# Altium PCB driver_lift_pcb.PcbDoc (part 2 of 2)
Units mm, origin at the board's own origin, x right, y up, seen from the top; angles counter-clockwise.
Board outline 100.2 x 76.58 mm, 2 copper layers (Top Layer, Bottom Layer); 113 components, 100 nets, 427 pads, 166 vias.
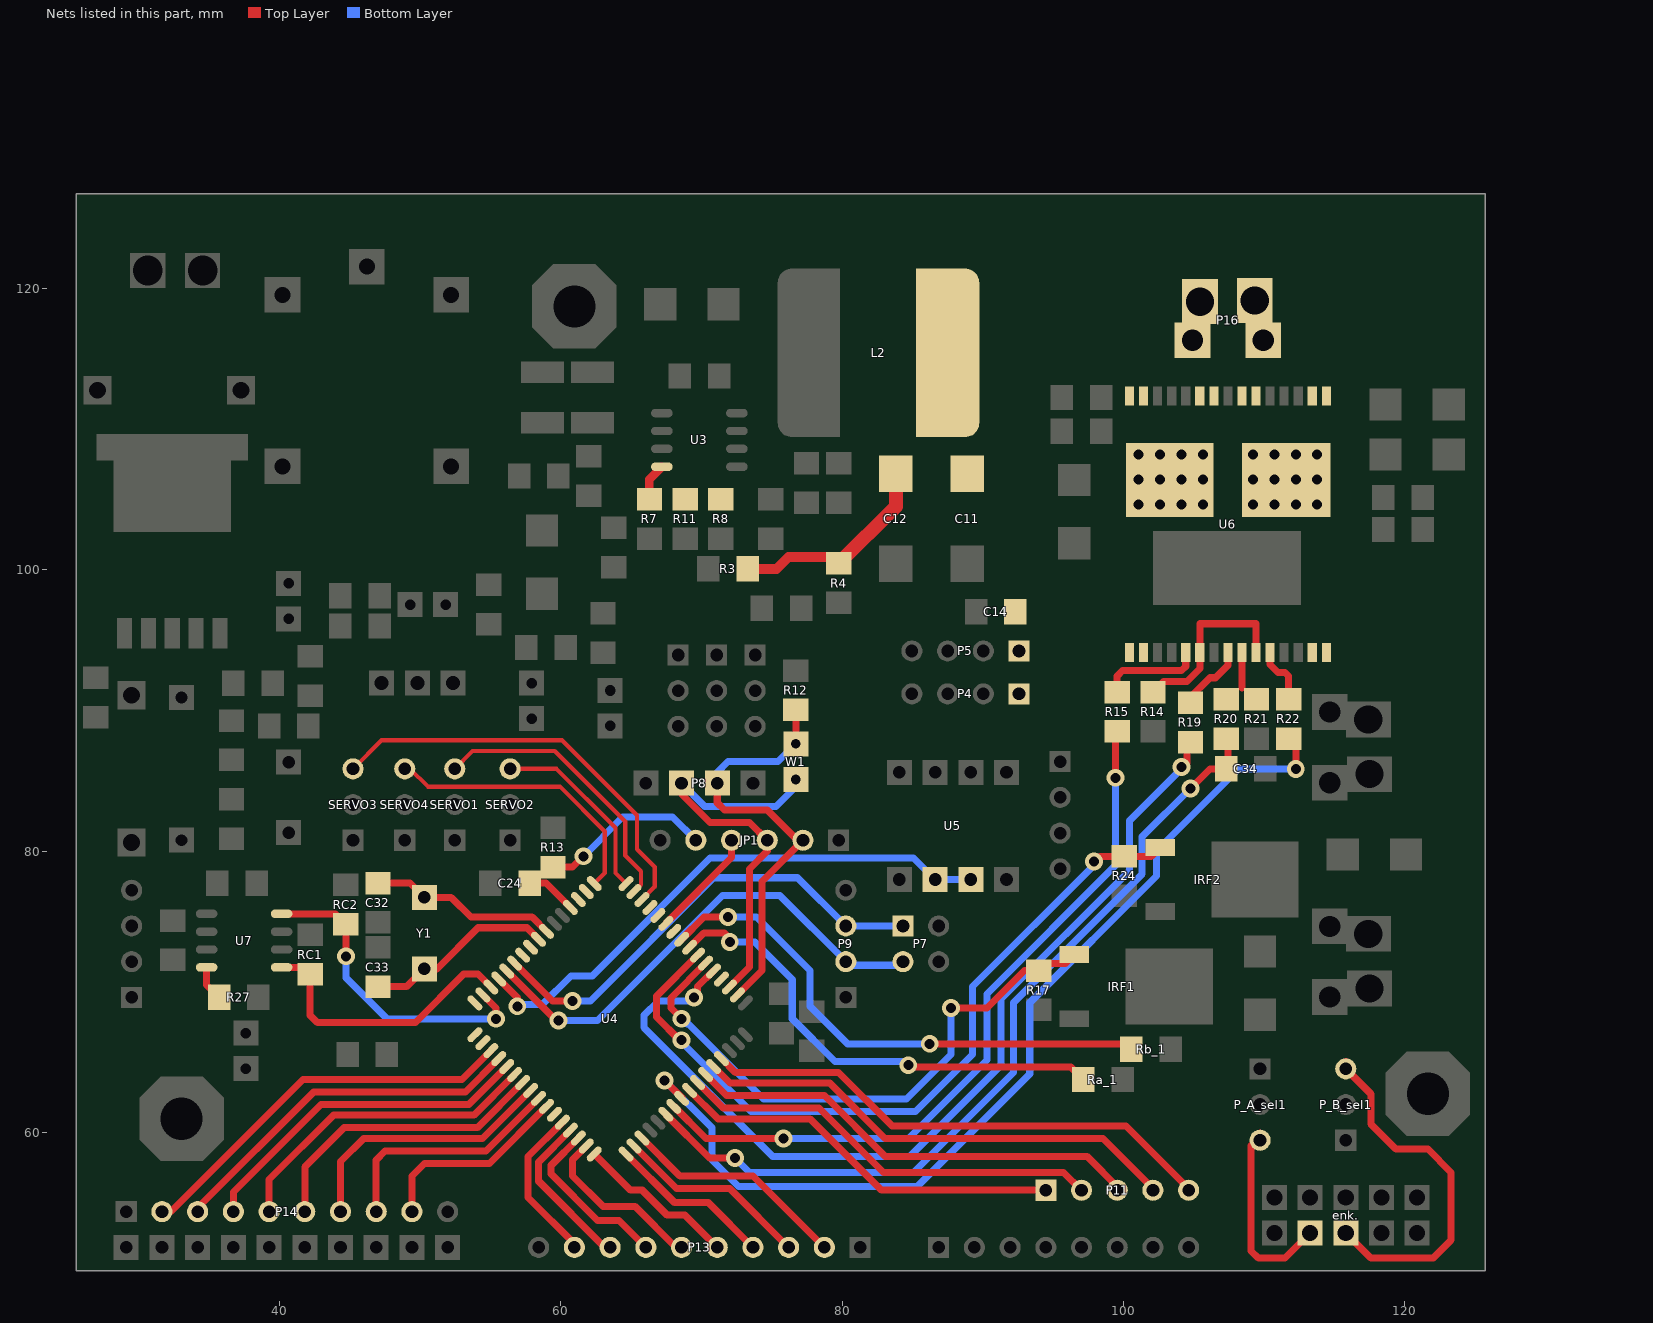
[diagram p2: the nets of this part, all layers, seen from the top]

## Via types
v1: diameter 1.27, hole 0.711, Top Layer to Bottom Layer, tented both sides, 166 vias

## Nets (pads, with @x,y where several pads share a name; then routed paths per layer and width w, separated by ;. In a path a pad name is that pad's centre, name@x,y a point inside that pad or via, vN(x,y) a via of type N, cw(c..) or ccw(c..) an arc to the next point about the centre after c; other vN are vias at no path point) (continued)
NetR7_2: R7.2 U3.4 | length 2.7
  Top Layer w0.6: R7.2@66.294,105.032 66.294,106.451 U3.4@67.183,107.34
NetR8_1: R8.1 R11.2
NetR14_1: R14.1 U6.6 U6.10 | length 13.2
  Top Layer w0.5: R14.1@102.108,91.316 102.867,92.075 104.521,92.075 105.442,92.996 U6.6@105.442,94.126 105.442,96.171 109.442,96.171 U6.10@109.442,94.126
NetR15_1: R15.1 U6.5 | length 7.3
  Top Layer w0.5: R15.1@99.568,91.316 99.568,92.456 99.949,92.837 101.6,92.837 104.14,92.837 104.442,93.139 U6.5@104.442,94.126
NetR19_1: R19.1 U6.8 | length 4.7
  Top Layer w0.5: R19.1@104.648,90.808 106.169,92.329 106.553,92.329 107.442,93.218 U6.8@107.442,94.126
NetR20_2: R20.2 R21.1 U6.9 | length 3.5
  Top Layer w0.5: R20.2@107.045,91.205 107.442,90.808 R20.2@107.172,91.078 ; 108.442,91.586 U6.9@108.442,94.126
NetR22_1: R22.1 U6.11 | length 4.2
  Top Layer w0.5: U6.11@110.442,94.126 110.442,93.266 110.998,92.71 111.506,92.71 111.76,92.456 R22.1@111.76,90.808
NetR27_2: R27.2 U7.8 | length 2.5
  Top Layer w0.5: U7.8@34.798,71.73 34.798,70.482 R27.2@35.684,69.596
OUTA1: P16.2 U6.1 U6.2 U6.24 U6.25 U6.29 U6.30 U6.32
  other v1: 101.092,104.648 102.616,104.648 104.14,104.648 105.664,104.648 101.092,106.426 102.616,106.426 104.14,106.426 105.664,106.426 101.092,108.204 102.616,108.204 104.14,108.204 105.664,108.204
OUTB1: P16.1 U6.14 U6.15 U6.16 U6.17 U6.21 U6.22 U6.33
  other v1: 109.22,104.648 110.744,104.648 112.268,104.648 113.792,104.648 109.22,106.426 110.744,106.426 112.268,106.426 113.792,106.426 109.22,108.204 110.744,108.204 112.268,108.204 113.792,108.204
PA0: P13.2 U4.51 | length 16.2
  Top Layer w0.5: U4.51@65.763,59.587 68.453,56.896 73.66,56.896 P13.2@78.74,51.816
PA1: P13.3 U4.50 | length 14
  Top Layer w0.5: U4.50@65.197,59.021 68.211,56.007 72.009,56.007 P13.3@76.2,51.816
PA2: P13.4 U4.49 | length 11.8
  Top Layer w0.5: U4.49@64.631,58.455 68.096,54.991 70.485,54.991 P13.4@73.66,51.816
PA3: P13.5 U4.48 | length 11.5
  Top Layer w0.5: U4.48@62.369,58.455 64.944,55.88 65.786,55.88 67.564,54.102 68.834,54.102 P13.5@71.12,51.816
PA4: P13.6 U4.47 | length 12.4
  Top Layer w0.5: U4.47@61.803,59.021 60.833,58.051 60.833,56.896 62.992,54.737 65.278,54.737 68.199,51.816 P13.6@68.58,51.816
PA5: P13.7 U4.46 | length 12.3
  Top Layer w0.5: U4.46@61.237,59.587 59.309,57.658 59.309,57.023 62.611,53.721 64.135,53.721 P13.7@66.04,51.816
PA6: P13.8 U4.45 | length 11.6
  Top Layer w0.5: U4.45@60.672,60.152 58.42,57.901 58.42,56.515 63.119,51.816 P13.8@63.5,51.816
PA7: P13.9 U4.44 | length 11.3
  Top Layer w0.5: U4.44@60.106,60.718 57.658,58.27 57.658,55.372 60.96,52.07 P13.9@60.96,51.816
PB0: U4.10
PB1(SCK): JP1.4 U4.11 | length 7.8
  Top Layer w0.5: U4.11@67.46,74.86 72.136,79.536 JP1.4@72.136,80.772
PB2: U4.12
PB3: U4.13
PB4: SERVO3.3 U4.14 | length 30.1
  Top Layer w0.3: SERVO3.3@45.212,85.852 47.244,87.884 60.071,87.884 65.405,82.55 65.405,80.135 66.675,78.865 66.675,77.47 U4.14@65.763,76.557
PB5: SERVO1.3 U4.15 | length 20.4
  Top Layer w0.3: SERVO1.3@52.451,85.852 53.721,87.122 59.563,87.122 64.579,82.105 64.579,79.68 65.688,78.571 65.688,77.614 U4.15@65.197,77.123
PB6: SERVO2.3 U4.16 | length 13.5
  Top Layer w0.3: SERVO2.3@56.388,85.852 59.69,85.852 63.881,81.661 63.881,78.439 U4.16@64.631,77.689
PB7: SERVO4.3 U4.17 | length 20.1
  Top Layer w0.3: SERVO4.3@48.895,85.852 49.276,85.852 50.546,84.582 59.944,84.582 63.119,81.407 63.119,78.439 U4.17@62.369,77.689
PC0: P14.2 U4.35 | length 28.1
  Top Layer w0.5: P14.2@31.623,54.356 32.258,54.356 41.656,63.754 52.959,63.754 U4.35@55.015,65.809
PC1: P14.3 U4.36 | length 26.1
  Top Layer w0.5: P14.3@34.163,54.356 34.163,54.61 42.418,62.865 53.202,62.865 U4.36@55.58,65.244
PC2: P14.4 U4.37 | length 24.5
  Top Layer w0.5: P14.4@36.703,54.356 36.703,55.753 42.926,61.976 53.444,61.976 U4.37@56.146,64.678
PC3: P14.5 U4.38 | length 22.8
  Top Layer w0.5: P14.5@39.243,54.356 39.243,56.642 43.815,61.214 53.814,61.214 U4.38@56.712,64.112
PC4: P14.6 U4.39 | length 21.2
  Top Layer w0.5: P14.6@41.783,54.356 41.783,57.531 44.577,60.325 54.056,60.325 U4.39@57.277,63.547
PC5: P14.7 U4.40 | length 19.2
  Top Layer w0.5: P14.7@44.323,54.356 44.323,57.912 45.974,59.563 54.425,59.563 U4.40@57.843,62.981
PC6: P14.8 U4.41 | length 17
  Top Layer w0.5: P14.8@46.863,54.356 46.863,58.039 47.498,58.674 54.668,58.674 U4.41@58.409,62.415
PC7: P14.9 U4.42 | length 14.2
  Top Layer w0.5: P14.9@49.403,54.356 49.403,56.896 50.292,57.785 54.91,57.785 U4.42@58.975,61.849
PD7: U4.32
PE2: U4.4
PE3: R19.2 U4.5 | length 68.3
  Top Layer w0.5: v1(69.469,69.596) 69.723,69.85 69.723,70.358 70.831,71.466 U4.5@70.854,71.466 ; v1(104.14,85.979) 104.267,85.979 104.521,86.233 104.521,87.881 R19.2@104.648,88.008
  Bottom Layer w0.5: v1(69.469,69.596) 69.215,69.342 66.929,69.342 65.913,68.326 65.913,67.437 75.057,58.293 84.836,58.293 91.313,64.77 91.313,69.469 100.457,78.613 100.457,82.169 104.267,85.979 v1(104.14,85.979)
PE4: IRF1.1 R17.1 U4.6 | length 42.5
  Top Layer w0.5: v1(68.58,68.072) 67.818,68.834 67.818,69.562 U4.6@70.288,72.032 69.797,71.54 ; v1(87.757,68.834) 90.297,68.834 92.967,71.504 R17.1@93.98,71.504 94.485,72.009 95.885,72.009 IRF1.1@96.52,72.644
  Bottom Layer w0.5: v1(68.58,68.072) 68.961,67.691 69.084,67.691 74.418,62.357 84.582,62.357 87.757,65.532 v1(87.757,68.834)
PE5: IRF2.1 R24.1 U4.7 | length 55
  Top Layer w0.5: v1(68.58,66.548) 68.453,66.548 66.802,68.199 66.802,69.677 U4.7@69.723,72.597 ; v1(97.917,79.248) 98.301,79.632 R24.1@100.076,79.632 101.984,79.632 IRF2.1@102.616,80.264
  Bottom Layer w0.5: v1(68.58,66.548) 68.58,66.421 73.533,61.468 85.217,61.468 89.281,65.532 89.281,70.358 97.917,78.994 v1(97.917,79.248)
PE6: Ra_1.1 U4.8 | length 34.5
  Top Layer w0.5: U4.8@69.157,73.163 70.162,74.168 71.628,74.168 v1@72.136,73.66 ; v1(84.709,64.77) 84.836,64.643 96.263,64.643 Ra_1.1@97.152,63.754
  Bottom Layer w0.5: v1(72.009,73.533) 73.787,73.533 76.454,70.866 76.454,68.072 79.502,65.024 84.582,65.024 84.709,64.897 v1(84.709,64.77)
PE7: Rb_1.1 U4.9 | length 38
  Top Layer w0.5: U4.9@68.591,73.729 70.173,75.311 v1(71.882,75.311) ; v1(86.233,66.294) 100.2,66.294 Rb_1.1@100.581,65.913
  Bottom Layer w0.5: v1(71.882,75.311) 73.914,75.311 77.724,71.501 77.724,68.961 80.391,66.294 v1(86.233,66.294)
PF0: P11.5 U4.61 | length 37.2
  Top Layer w0.5: U4.61@71.42,65.244 72.401,64.262 79.756,64.262 83.566,60.452 100.203,60.452 104.648,56.007 P11.5@104.648,55.88
PF1: P11.4 U4.60 | length 35
  Top Layer w0.5: U4.60@70.854,64.678 72.032,63.5 79.121,63.5 83.058,59.563 98.552,59.563 102.108,56.007 P11.4@102.108,55.88
PF2: P11.3 U4.59 | length 32.8
  Top Layer w0.5: U4.59@70.288,64.112 71.789,62.611 78.74,62.611 83.058,58.293 97.409,58.293 P11.3@99.695,56.007
PF3: P11.2 U4.58 | length 30.5
  Top Layer w0.5: U4.58@69.723,63.547 71.547,61.722 78.359,61.722 82.931,57.15 95.758,57.15 P11.2@97.028,55.88
PF4: P11.1 U4.57 | length 28.3
  Top Layer w0.5: U4.57@69.157,62.981 71.178,60.96 77.724,60.96 82.804,55.88 P11.1@94.488,55.88
PF5: R22.2 U4.56 | length 69.9
  Top Layer w0.5: v1(67.372,63.692) 68.605,62.459 68.605,62.429 U4.56@68.591,62.415 ; R22.2@111.76,88.008 112.268,87.5 v1(112.268,85.852)
  Bottom Layer w0.5: v1(67.372,63.692) 70.739,60.325 70.739,58.039 72.644,56.134 85.344,56.134 93.345,64.135 93.345,69.215 102.362,78.232 102.362,80.01 108.204,85.852 v1(112.268,85.852)
PF6: R15.2 U4.55 | length 52.7
  Top Layer w0.5: U4.55@68.025,61.849 70.312,59.563 v1(75.819,59.563) ; v1(99.441,85.217) 99.441,88.389 R15.2@99.568,88.516
  Bottom Layer w0.5: v1(75.819,59.563) 84.709,59.563 90.297,65.151 90.297,69.85 99.441,78.994 v1(99.441,85.217)
PF7: C34.2 R20.1 U4.54 | length 60.1
  Top Layer w0.5: U4.54@67.46,61.284 70.578,58.166 v1(72.39,58.166) ; v1(104.775,84.455) 106.172,85.852 C34.2@107.312,85.852 107.442,85.982 R20.1@107.442,88.008
  Bottom Layer w0.5: v1(72.39,58.166) 73.406,57.15 85.09,57.15 92.202,64.262 92.202,69.215 101.346,78.359 101.346,81.026 v1(104.775,84.455)
PG0: U4.33
PG1: U4.34
PG2: U4.43
PG3: U4.18
PG4: U4.19
RESET: C24.2 JP1.5 R13.1 U4.20 | length 16.2
  Top Layer w0.5: C24.2@57.788,77.724 58.939,77.724 U4.20@60.672,75.992 ; R13.1@59.436,78.864 60.83,78.864 v1(61.595,79.629)
  Bottom Layer w0.5: v1(61.595,79.629) 64.389,82.423 67.945,82.423 JP1.5@69.596,80.772 JP1.5@69.596,80.518
RXCAN: RC2.1 U4.31 U7.4 | length 22.6
  Top Layer w0.5: U7.4@40.132,75.54 43.964,75.54 RC2.1@44.704,74.8 v1(44.704,72.517) ; U4.31@54.449,69.769 55.372,68.846 v1(55.372,68.072)
  Bottom Layer w0.5: v1(44.704,72.517) 44.704,70.993 47.625,68.072 v1(55.372,68.072)
RXD0/PDI: JP1.2 P8.3 R12.1 U4.2 W1.1 | length 30.8
  Top Layer w0.5: P8.3@71.12,84.836 71.12,83.439 71.628,82.931 74.676,82.931 77.025,80.581 74.295,77.851 74.295,71.513 U4.2@72.551,69.769 ; W1.1@76.708,87.122 R12.1@76.708,89.532
  Bottom Layer w0.5: P8.3@71.12,84.836 71.12,85.598 71.882,86.36 75.438,86.36 W1.1@76.708,87.63
RXD1: P7.1 P9.3 U4.27 | length 33.8
  Top Layer w0.5: U4.27@56.712,72.032 59.402,69.342 v1(60.833,69.342)
  Bottom Layer w0.5: v1(60.833,69.342) 62.103,69.342 70.866,78.105 76.835,78.105 P9.3@80.264,74.676 P7.1@84.328,74.676
S_11.1V: C11.1 C12.1 C14.2 L2.2 P4.1 P5.1 R3.2 R4.2 | length 15.1
  Top Layer w0.7: R3.2@73.282,100.076 75.323,100.076 76.177,100.93 79.286,100.93 R4.2@79.756,100.46
  Top Layer w1: R4.2@79.756,100.46 83.82,104.524 C12.1@83.82,106.832
SCL: U4.25
SDA: U4.26
SMER_485: U4.29 U5.2 U5.3 | length 39.7
  Top Layer w0.5: U4.29@55.58,70.9 56.896,69.585 v1(56.896,68.961)
  Bottom Layer w0.5: v1(56.896,68.961) 57.023,69.088 58.674,69.088 60.706,71.12 62.23,71.12 70.612,79.502 85.09,79.502 U5.2@86.614,77.978 U5.3@89.154,77.978
TXCAN: RC1.1 U4.30 U7.1 | length 20
  Top Layer w0.5: U7.1@40.132,71.73 41.678,71.73 RC1.1@42.164,71.244 42.164,68.326 42.672,67.818 49.657,67.818 53.086,71.247 54.102,71.247 U4.30@55.015,70.335
TXD0/PDO: JP1.3 P8.2 U4.3 W1.2 | length 29.2
  Top Layer w0.5: P8.2@68.58,84.836 68.58,84.074 70.612,82.042 73.406,82.042 JP1.3@74.676,80.772 74.676,80.01 73.406,78.74 73.406,77.089 73.406,71.755 U4.3@71.985,70.335
  Bottom Layer w0.5: P8.2@68.58,84.836 70.231,83.185 75.311,83.185 W1.2@76.708,84.582
TXD1: P7.3 P9.2 U4.28 | length 35.4
  Top Layer w0.5: U4.28@56.146,71.466 59.667,67.945 v1(59.817,67.945)
  Bottom Layer w0.5: v1(59.817,67.945) 62.611,67.945 71.501,76.835 75.565,76.835 P9.2@80.264,72.136 ; P9.2@80.264,71.882 84.074,71.882 P7.3@84.328,72.136
XTAL1: C33.1 U4.24 Y1.1 | length 13.5
  Top Layer w0.5: C33.1@46.99,70.355 49.019,70.355 Y1.1@50.292,71.628 51.181,71.628 54.102,74.549 57.589,74.549 U4.24@58.409,73.729
XTAL2: C32.1 U4.23 Y1.2 | length 13.4
  Top Layer w0.5: C32.1@46.99,77.727 49.273,77.727 Y1.2@50.292,76.708 52.197,76.708 53.594,75.311 57.958,75.311 U4.23@58.975,74.295
~A1: enk..3 P_A_sel1.3 | length 13.8
  Top Layer w0.5: P_A_sel1.3@109.728,59.944 109.728,59.69 109.093,59.055 109.093,51.562 109.601,51.054 111.506,51.054 enk..3@113.284,52.832
~B1: enk..5 P_B_sel1.3 | length 25.9
  Top Layer w0.5: enk..5@115.824,52.832 117.602,51.054 122.047,51.054 123.317,52.324 123.317,57.15 121.666,58.801 119.38,58.801 117.602,60.579 117.602,62.738 P_B_sel1.3@115.824,64.516 P_B_sel1.3@115.824,65.024
pads on no net: enk..1 enk..2 enk..7 enk..10 RL1.3 U4.1 U6.7 U7.5

## Keep-outs
Keep-Out Layer:
  lines w0.254: 25.527,50.165 125.73,50.165 125.73,126.746 84.709,126.746 54.483,126.746 25.527,126.746 25.527,50.165

## Other copper
Top Layer:
  rectangle net GND: 100.965,76.073 101.727,77.597
  rectangle net GND: 94.869,67.437 95.885,69.469
  rectangle net +5: 37.592,76.708 45.72,79.629
  rectangle net GND: 101.727,75.057 105.791,78.105
  rectangle net GND: 95.504,67.437 99.695,70.485
  rectangle net NetDZ1_1: 108.585,67.183 119.126,69.469
  rectangle net GND: 68.834,106.426 70.866,111.76
  rectangle net NetR14_1: 105.156,95.377 109.728,96.52
  rectangle net +12V: 116.332,94.996 120.777,95.504
  rectangle net GND: 116.078,101.981 119.888,113.538
  rectangle net +12V: 98.425,95.377 99.187,109.22
  rectangle net +12V: 97.409,108.966 99.314,113.284
  rectangle net +12V: 94.869,95.377 98.933,103.251
  rectangle net GND: 96.52,105.029 97.917,107.696
  rectangle net GND: 94.869,105.029 96.52,109.347
  rectangle net GND: 94.869,109.347 96.52,113.538
  rectangle net +12V: 115.951,94.996 125.349,101.473
  rectangle net +12V: 111.125,93.472 112.649,97.663
  rectangle net +12V: 102.108,93.472 103.759,97.536
  rectangle net OUTB1: 113.157,93.472 115.189,104.013
  rectangle net OUTA1: 99.822,93.472 101.727,109.22
  rectangle net +12V: 53.975,114.554 54.61,126.365
  rectangle net +12V: 56.261,115.697 57.404,122.682
  rectangle net +12V: 54.61,112.649 56.261,122.301
  rectangle net +12V: 54.61,122.301 59.182,126.365
  rectangle net +12V: 48.387,112.649 55.753,116.332
  rectangle net +12V: 45.085,109.728 54.61,112.649
  rectangle net +12V: 44.323,105.029 49.911,109.855
  rectangle net NetD6_1: 32.512,123.063 45.72,124.079
  rectangle net +12V: 120.269,96.647 125.349,126.365
  rectangle net GND: 99.314,121.158 115.316,121.92
  rectangle net S_11.1V: 91.313,89.916 94.234,121.412
  rectangle net GND: 111.887,113.538 119.888,121.92
  rectangle net GND: 94.869,113.538 103.124,121.92
  rectangle net GND: 99.314,113.538 115.57,114.681
  rectangle net GND: 110.109,110.871 112.776,113.538
  rectangle net GND: 102.108,110.871 104.775,113.538
  rectangle net OUTB1: 108.077,111.633 109.728,113.03
  rectangle net +12V: 107.061,102.235 107.823,113.03
  rectangle net OUTB1: 108.331,103.759 109.728,111.76
  rectangle net OUTB1: 113.157,103.505 115.189,113.03
  rectangle net OUTA1: 105.156,103.759 106.553,113.03
  rectangle net OUTA1: 105.156,111.633 106.807,113.03
  rectangle net OUTA1: 99.822,108.966 101.727,113.03
  rectangle net +9.6V: 65.024,92.71 67.564,95.25
  rectangle net +9.6V: 61.722,90.297 65.024,93.218
  rectangle net +9.6V: 64.008,93.218 65.024,95.123
  rectangle net +9.6V: 67.564,92.71 74.93,95.25
  rectangle net Netr1_1: 43.434,92.202 45.339,99.06
  rectangle net Netr1_1: 43.434,90.932 48.26,92.964
  rectangle net +9.6V: 48.514,90.297 50.927,92.964
  rectangle net +9.6V: 48.514,88.519 59.436,90.424
  rectangle net +9.6V: 61.722,93.218 64.008,95.123
  rectangle net +9.6V: 59.436,88.646 61.722,95.504
  rectangle net +12V: 53.086,96.393 53.467,97.917
  rectangle net +12V: 51.181,90.805 53.467,96.393
  rectangle net +12V: 50.546,96.393 53.086,100.33
  rectangle net +12V: 53.086,97.917 56.642,100.203
  rectangle net +12V: 56.007,98.552 56.769,101.092
  rectangle net +12V: 56.642,96.901 60.198,100.203
  rectangle net +12V: 28.448,98.298 39.116,101.473
  rectangle net +12V: 38.989,104.775 44.577,109.855
  rectangle net +12V: 38.1,98.298 41.783,106.68
  rectangle net GND: 35.306,94.869 40.513,96.393
  rectangle net NetD2_2: 28.194,89.535 34.417,92.202
  rectangle net NetD2_2: 29.21,91.821 31.369,93.98
  rectangle net GND: 26.035,86.487 27.813,90.297
  rectangle net +12V: 26.162,91.567 27.813,96.647
  rectangle net +12V: 26.162,94.488 29.464,96.647
  rectangle net GND: 33.782,84.074 37.465,86.484
  rectangle net +5: 31.369,79.375 34.925,82.55
  rectangle net +5: 34.29,79.375 42.037,81.788
  rectangle net GND: 39.37,94.869 41.91,97.536
  rectangle net +5: 37.973,88.011 39.37,89.789
  rectangle net +12V: 38.227,100.203 53.721,105.156
  rectangle net NetC15_1: 59.055,105.156 60.706,111.252
  rectangle net GND: 57.023,113.157 65.786,114.935
  rectangle net GND: 63.881,114.554 65.786,116.459
  rectangle net NetC15_1: 59.69,104.521 62.865,106.172
  rectangle net NetC15_1: 56.515,101.6 61.468,105.283
  rectangle net GND: 60.96,99.06 67.31,101.219
  rectangle net GND: 65.405,100.965 67.183,101.473
  rectangle net NetC15_1: 61.976,109.601 66.04,111.379
  rectangle net GND: 63.881,115.062 68.326,116.713
  rectangle net GND: 65.913,115.062 68.326,120.015
  rectangle net GND: 65.405,99.06 69.215,103.124
  rectangle net NetC13_2: 70.485,112.268 79.883,121.412
  rectangle net NetC13_2: 71.755,110.871 76.073,113.538
  rectangle net NetR8_1: 67.945,104.267 72.136,105.791
  rectangle net NetR3_1: 70.485,99.187 71.247,102.997
  rectangle net +12V: 59.182,122.301 125.349,126.365
  rectangle net +12V: 52.705,100.203 56.007,105.156
  rectangle net S_11.1V: 85.344,105.537 93.218,121.412
  rectangle net S_11.1V: 85.217,105.537 90.424,121.285
  rectangle net S_11.1V: 82.55,105.664 87.63,109.093
  rectangle net GND: 82.296,98.806 90.424,101.854
  rectangle net GND: 85.344,100.965 90.424,104.902
  rectangle net GND: 82.296,96.012 90.297,98.806
  rectangle net +5: 42.037,79.375 57.658,81.915
  rectangle net GND: 46.101,72.39 47.879,75.692
  rectangle net NetR20_2: 106.553,90.043 110.363,91.567
  rectangle net +12V: 121.031,72.517 125.349,94.996
  rectangle net +12V: 113.284,87.757 121.158,91.313
  rectangle net +12V: 113.284,72.517 121.031,75.946
  rectangle net +12V: 110.744,72.517 113.284,74.041
  rectangle net NetDZ2_1: 106.299,78.613 114.427,80.899
  rectangle net NetDZ2_1: 114.427,80.899 116.84,84.328
  rectangle net NetDZ1_1: 100.203,67.183 108.585,69.596
  region net +12V: 52.451,116.332 53.975,117.856 53.975,116.332
  region net +12V: 54.61,109.728 56.261,111.379 56.261,112.649 54.61,112.649
  region net +12V: 48.387,116.332 41.91,109.855 48.387,109.855
  region net NetD6_1: 32.512,124.079 32.512,110.49 25.908,110.49 25.908,126.365 48.26,126.365 48.26,119.38 43.688,119.38 43.688,124.079
Bottom Layer:
  rectangle net +5: 87.884,50.673 105.791,52.832
  rectangle net +5: 85.725,50.673 87.884,54.356
  rectangle net +5: 53.213,54.356 87.884,55.626
  rectangle net +5: 51.054,53.467 53.213,55.626
  rectangle net GND: 80.264,50.8 82.423,53.086
  rectangle net GND: 56.642,53.086 82.423,54.102
  rectangle net GND: 54.229,52.832 56.642,54.102
  rectangle net +5: 39.37,76.835 43.942,80.01
  rectangle net GND: 30.099,50.546 56.642,52.832
  rectangle net GND: 27.94,50.546 30.099,53.34
  rectangle net GND: 27.94,53.34 30.099,55.372
  rectangle net GND: 25.908,50.546 27.94,68.326
  rectangle net GND: 27.94,76.2 30.353,78.105
  rectangle net GND: 25.908,68.326 27.94,79.375
  rectangle net GND: 105.791,76.327 120.904,78.105
  rectangle net GND: 102.235,74.93 102.87,77.216
  rectangle net GND: 102.87,74.93 105.791,78.105
  rectangle net GND: 120.904,66.294 125.222,66.802
  rectangle net GND: 95.631,66.294 120.904,68.072
  rectangle net GND: 95.631,66.294 99.568,70.358
  rectangle net GND: 120.904,66.802 125.222,94.488
  rectangle net GND: 30.607,82.677 41.91,84.328
  rectangle net GND: 27.94,86.487 34.671,89.535
  rectangle net GND: 34.671,86.487 43.18,92.456
  rectangle net GND: 120.904,94.488 125.349,104.14
  rectangle net GND: 119.888,104.14 125.349,123.063
  rectangle net +12V: 94.869,94.996 120.65,102.87
  rectangle net GND: 55.499,113.03 56.896,114.935
  rectangle net GND: 55.499,114.935 57.658,117.348
  rectangle net GND: 115.951,104.14 119.888,113.538
  rectangle net GND: 115.951,113.538 119.888,126.365
  rectangle net GND: 93.218,96.012 94.234,121.539
  rectangle net GND: 94.869,113.538 98.806,126.365
  rectangle net OUTB1: 108.077,103.632 115.57,122.047
  rectangle net OUTA1: 99.314,103.632 106.807,122.047
  rectangle net GND: 32.512,124.206 45.466,126.365
  rectangle net GND: 48.26,123.063 125.349,126.365
  rectangle net GND: 61.976,92.583 64.897,93.472
  rectangle net GND: 61.849,88.138 64.516,89.916
  rectangle net GND: 60.071,88.519 61.976,93.345
  rectangle net GND: 64.77,92.075 66.421,93.345
  rectangle net GND: 65.278,88.011 74.93,89.789
  rectangle net GND: 65.278,93.345 66.421,96.266
  rectangle net GND: 61.722,96.266 66.421,97.917
  rectangle net GND: 56.769,90.805 59.055,93.345
  rectangle net GND: 50.419,93.345 65.278,96.266
  rectangle net GND: 55.499,99.06 60.198,101.727
  rectangle net GND: 43.18,93.345 50.419,99.06
  rectangle net GND: 36.195,92.456 43.18,97.536
  rectangle net GND: 55.499,101.727 62.103,113.03
  rectangle net GND: 32.512,115.57 43.688,124.714
  rectangle net GND: 29.21,104.902 35.814,118.872
  rectangle net GND: 26.67,103.505 38.1,109.855
  rectangle net GND: 25.908,79.375 27.94,109.855
  rectangle net GND: 25.908,79.375 30.861,82.423
  rectangle net GND: 26.67,92.456 38.1,103.759
  rectangle net GND: 37.719,94.742 41.91,97.536
  rectangle net GND: 25.908,84.074 35.56,86.487
  rectangle net GND: 26.67,82.423 30.861,85.852
  rectangle net GND: 39.37,85.09 41.91,87.63
  rectangle net GND: 34.544,84.201 41.91,86.487
  rectangle net GND: 39.751,109.855 55.499,117.348
  rectangle net GND: 63.881,113.157 65.786,116.459
  rectangle net GND: 56.896,112.522 65.786,115.062
  rectangle net GND: 60.96,99.06 67.31,101.219
  rectangle net GND: 60.198,99.06 67.31,105.41
  rectangle net GND: 56.388,101.727 61.976,105.537
  rectangle net GND: 66.548,99.06 79.756,103.124
  rectangle net GND: 76.327,102.362 79.756,104.013
  rectangle net GND: 61.849,102.362 79.756,112.903
  rectangle net GND: 42.164,82.296 57.531,84.201
  rectangle net GND: 41.91,82.296 43.307,87.63
  rectangle net GND: 64.77,88.011 66.421,92.075
  rectangle net GND: 64.516,88.011 64.77,89.916
  rectangle net GND: 83.693,90.043 86.106,95.885
  rectangle net GND: 43.688,123.19 48.26,126.365
  region net GND: 63.881,116.459 64.897,117.475 64.897,121.539 93.218,121.539 93.218,95.885 73.152,95.885 73.152,103.759 63.881,113.03

## Silkscreen, mask and mechanical layers (free items; w line width, h text height)
Top Overlay:
  lines w0.2: 46.355,99.822 46.863,99.314 ; 46.863,99.441 46.863,99.695 ; 46.863,101.854 46.863,99.695 ; 47.371,99.822 46.863,99.314 ; 75.184,71.501 75.184,78.867 82.296,78.867 82.296,70.104 85.852,70.104 85.852,67.691 79.375,67.691 ; 94.742,95.123 94.615,94.996 ; 123.571,114.3 123.952,113.919 ; 123.952,116.205 123.952,113.919 ; 124.333,114.3 123.952,113.919 ; 46.863,99.314 46.863,99.695 ; 94.615,94.996 96.52,94.996 96.52,89.789 94.361,89.789 94.361,88.265 83.185,88.265 83.185,95.885 94.615,95.885 94.615,94.996
  lines w0.254: 78.359,88.9 77.978,89.281 ; 78.359,89.662 77.978,89.281 ; 78.359,91.186 77.978,91.567 ; 78.359,91.948 77.978,91.567 ; 78.359,93.472 77.978,93.853 ; 78.359,94.234 77.978,93.853 ; 79.248,89.281 77.978,89.281 ; 79.248,91.567 77.978,91.567 ; 79.248,93.853 77.978,93.853
  text "GND" at 34.163,125.095 h1.5
  text "VCC" at 27.559,121.92 h1.5 r90
  text "VCC" at 27.559,118.364 h1.5 r90
  text "9.6V" at 79.756,93.472 h1.5
  text "SIG" at 79.756,91.059 h1.5
  text "RX-24" at 96.139,90.424 h1.5 r90
  text "GND" at 79.756,88.773 h1.5
  text "11.1V" at 91.059,88.519 h1.5
  text "GND" at 83.566,88.392 h1.5
  text "AX-12" at 78.232,87.122 h1.5
  text "GND" at 64.262,86.233 h1.5
  text "TX" at 67.691,86.233 h1.5
  text "RX" at 70.231,86.233 h1.5
  text "5V" at 72.771,86.233 h1.5
  text "ENABLE" at 78.232,85.598 h1.5
  text "UART0" at 67.564,82.55 h1.3
  text "PROGRAMATOR" at 65.913,78.232 h1.5
  text "GND" at 25.654,76.835 h1.5
  text "5V" at 76.835,76.581 h1.5
  text "RX-485" at 88.392,74.422 h1.5
  text "L" at 26.543,74.168 h1.5
  text "RX" at 76.835,74.168 h1.5
  text "TX" at 76.835,72.009 h1.5
  text "H" at 26.543,71.755 h1.5
  text "UART1" at 76.708,71.755 h1.5 r90
  text "TX-485" at 88.392,71.628 h1.5
  text "+5V" at 25.654,69.088 h1.5
  text "GND" at 82.042,68.58 h1.5
  text "A" at 106.934,63.881 h1.5
  text "B" at 112.649,63.881 h1.5
  text "ELECTROPIONEER" at 37.338,60.452 h2.5
  text "~B" at 112.268,58.801 h1.5
  text "~A" at 106.045,58.674 h1.5
  text "driver_lift_1.0" at 37.338,58.42 h2.5
  text "F4" at 93.599,57.658 h1.5
  text "F3" at 96.266,57.658 h1.5
  text "F2" at 98.806,57.658 h1.5
  text "F1" at 101.6,57.658 h1.5
  text "F0" at 104.009,57.642 h1.5
  text "C7" at 48.641,56.261 h1.5
  text "C0" at 30.988,56.134 h1.5
  text "C1" at 33.655,56.134 h1.5
  text "C2" at 36.322,56.134 h1.5
  text "C3" at 38.862,56.134 h1.5
  text "C4" at 41.275,56.134 h1.5
  text "C5" at 43.815,56.134 h1.5
  text "+5V" at 50.927,56.134 h1.5
  text "C6" at 46.351,56.118 h1.5
  text "+5V" at 85.471,53.594 h1.5
  text "+5V" at 57.658,53.467 h1.5
  text "A6" at 62.738,53.467 h1.5
  text "A5" at 65.405,53.467 h1.5
  text "A3" at 70.485,53.467 h1.5
  text "A0" at 78.105,53.467 h1.5
  text "GND" at 80.01,53.467 h1.5
  text "A7" at 60.198,53.451 h1.5
  text "A4" at 67.818,53.451 h1.5
  text "A2" at 73.406,53.451 h1.5
  text "A1" at 75.561,53.451 h1.5
  text "GND" at 27.305,50.8 h1.5 r90

## Text inside footprints (layer, text, board x,y; h text height)
C1: Top Overlay "+" at 59.817,89.154 h1.5 r90
C2: Top Overlay "+" at 64.516,91.821 h1.5 r270
C6: Top Overlay "+" at 38.735,99.441 h1.5 r270
C8: Top Overlay "+" at 41.173,79.502 h1.5 r90
C9: Top Overlay "+" at 52.07,99.441 h1.5 r180
C20: Top Overlay "+" at 36.576,64.135 h1.5 r90
C24: Top Overlay "+" at 53.467,76.835 h1.5